# Altium PCB LOAD CONTROL_Final2.PcbDoc (part 1 of 2)
Units mm, origin at the board's own origin, x right, y up, seen from the top; angles counter-clockwise.
Board outline 51.64 x 106.92 mm, 2 copper layers (Top Layer, Bottom Layer); 86 components, 56 nets, 285 pads, 99 vias.
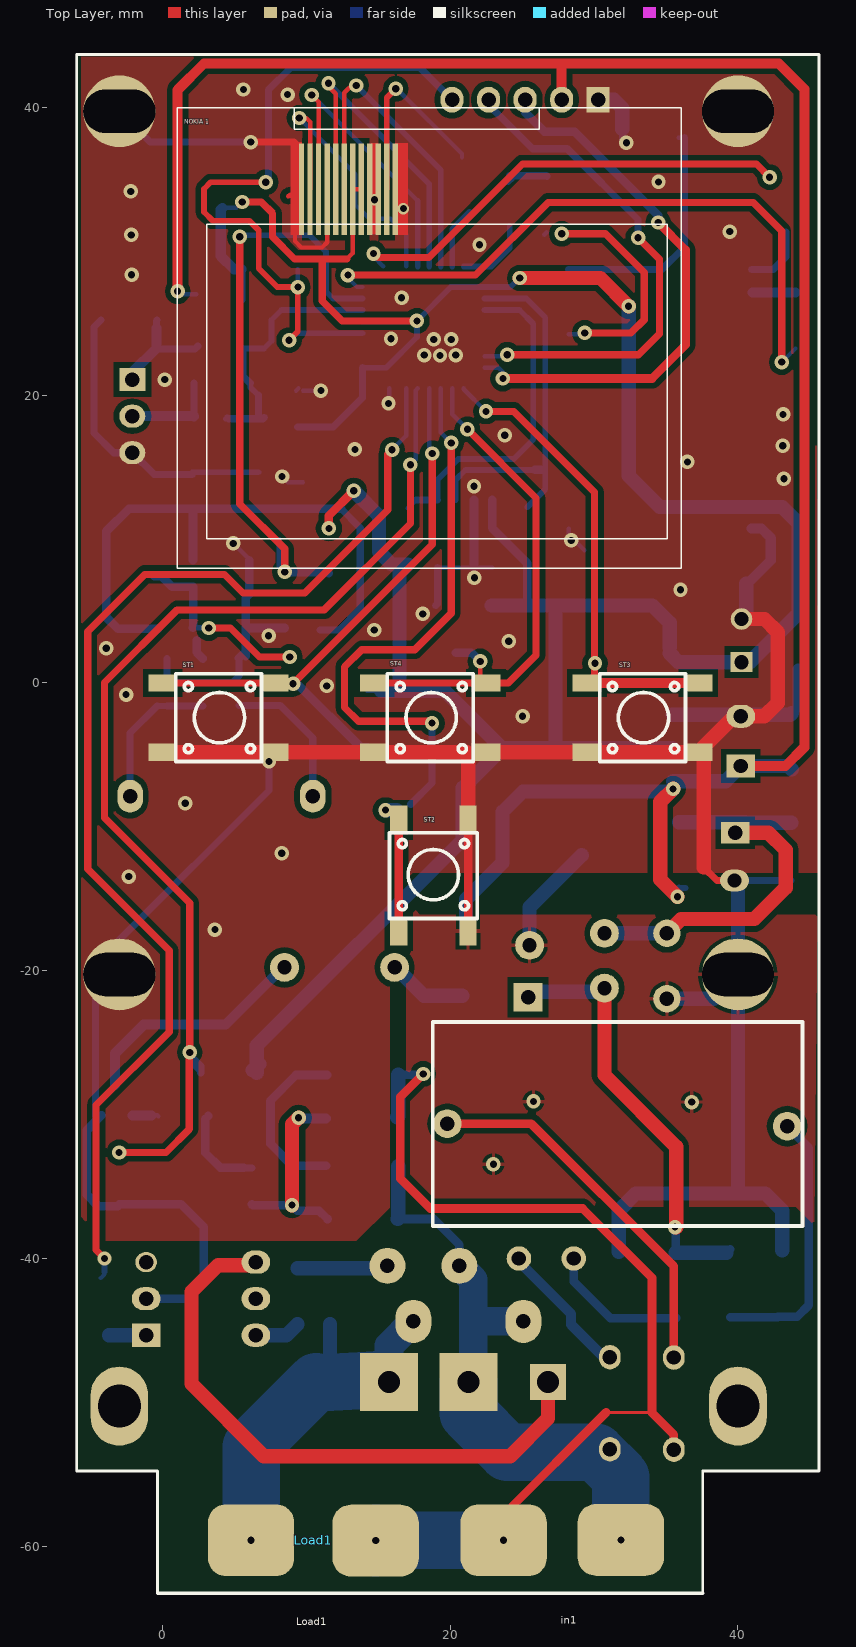
[diagram p0: Top Layer view]
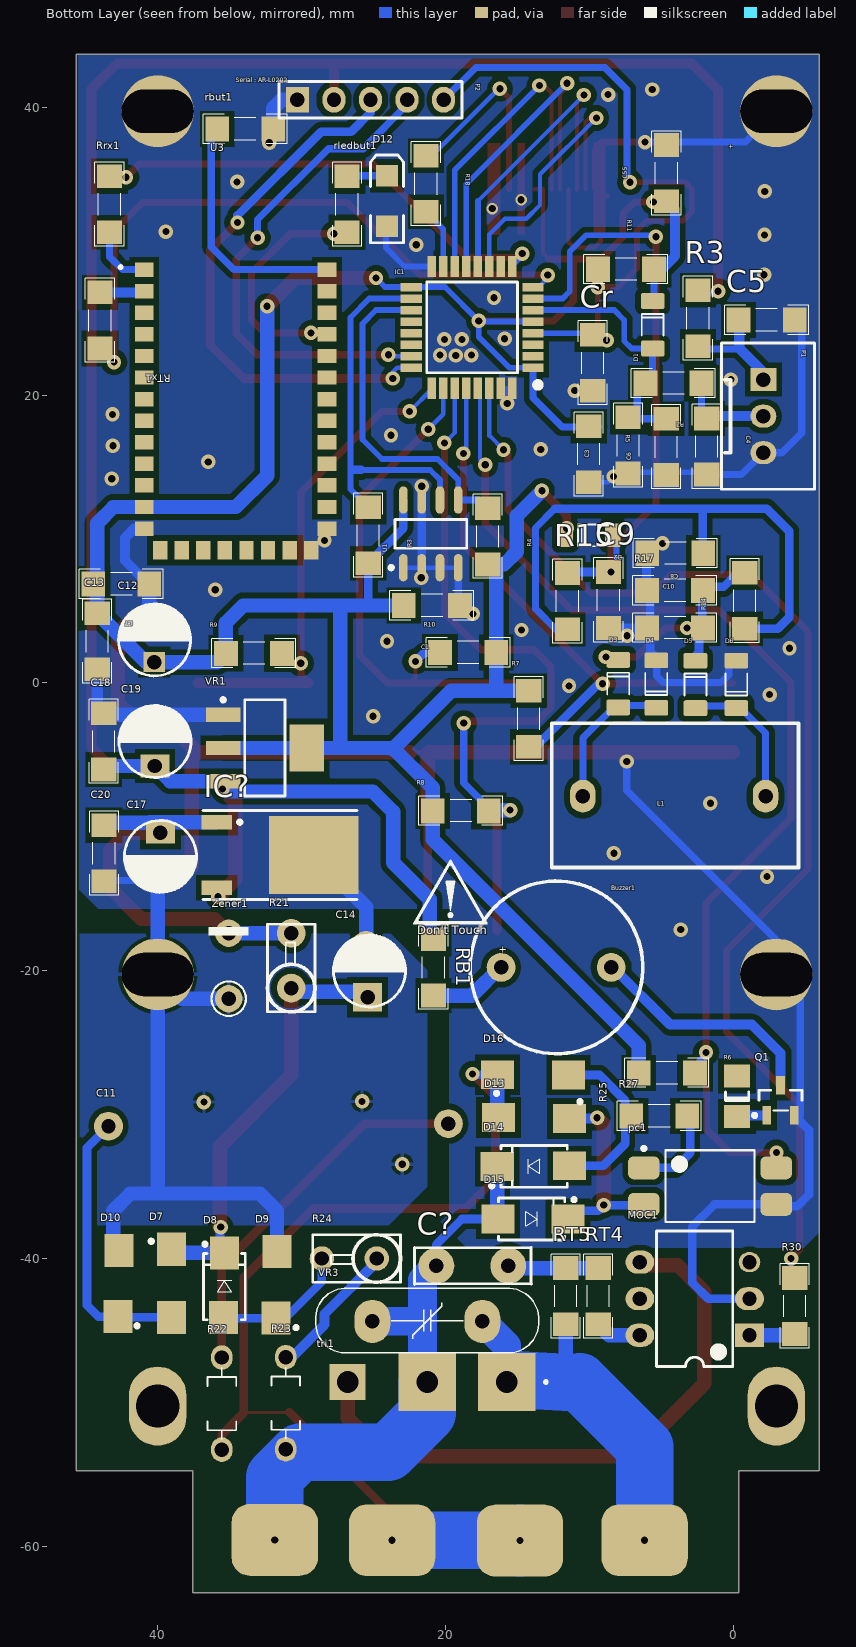
[diagram p1: Bottom Layer view, seen from below]
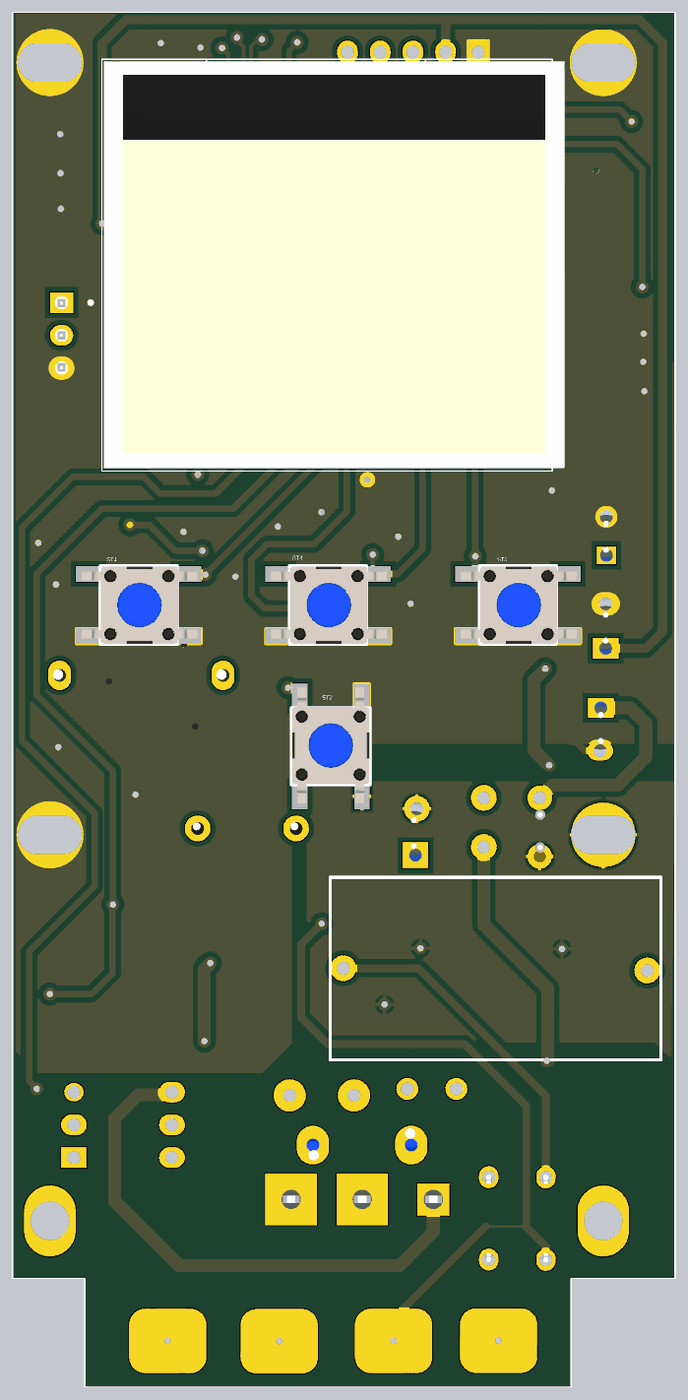
[diagram p2: 3D render of the assembled board from above, using the file's embedded part models]
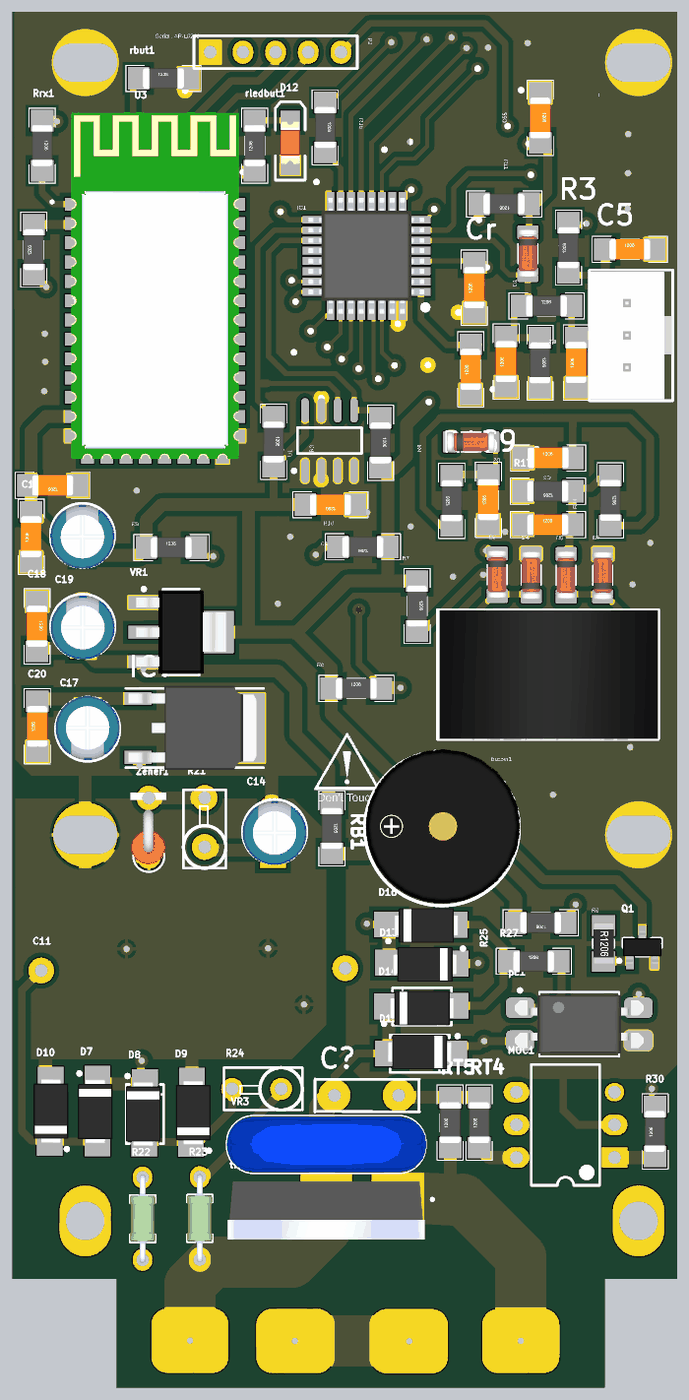
[diagram p3: 3D render of the assembled board from below, using the file's embedded part models]

## Layer stack, top to bottom
Top Solder: solder mask 0.0102, Solder Resist, Dk 3.5
Top Layer: signal copper 0.0356
Dielectric 1: dielectric 0.32, FR-4, Dk 4.8
Bottom Layer: signal copper 0.0356
Bottom Solder: solder mask 0.0102, Solder Resist, Dk 3.5

## Board outline
-0.358,-63.231 -0.358,-54.77 -5.969,-54.77 -5.969,43.686 45.666,43.686 45.666,-54.77 37.592,-54.77 37.592,-63.231

## Design rules (kind name [scope] priority, off if disabled: settings)
Clearance Clearance_18 [InNamedPolygon('Top Layer-No Net')] p1: gap=0.4 ignorepadtopadclearanceinfootprint=FALSE
Clearance Clearance_17 [InNamedPolygon('Top Layer-No Net')] p2: gap=0.254 ignorepadtopadclearanceinfootprint=FALSE except(0: Arc-Hole Track-Hole SMDPad-Hole THPad-Hole Via-Hole Fill-Hole Poly-Hole Region-Hole Text-Hole)
Clearance Clearance_16 [InNamedPolygon('Top Layer-No Net')] p3: gap=0.4 ignorepadtopadclearanceinfootprint=FALSE
Clearance Clearance_15 [InNamedPolygon('GND_L02_P008')] p4: gap=0.3 ignorepadtopadclearanceinfootprint=TRUE
Clearance Clearance_14 [InNamedPolygon('GND_L01_P006')] p5: gap=0.381 ignorepadtopadclearanceinfootprint=TRUE
Clearance Clearance_13 [InNamedPolygon('GND_L01_P006')] p6: gap=0.381 ignorepadtopadclearanceinfootprint=TRUE
Clearance Clearance_12 [InNamedPolygon('GND_L01_P006')] p7: gap=0.2 ignorepadtopadclearanceinfootprint=FALSE
Clearance Clearance_11 [InNamedPolygon('GND_L01_P006')] p8: gap=0.254 ignorepadtopadclearanceinfootprint=FALSE except(0: Arc-Hole Track-Hole SMDPad-Hole THPad-Hole Via-Hole Fill-Hole Poly-Hole Region-Hole Text-Hole)
Clearance Clearance_10 [InNamedPolygon('GND_L02_P008')] p9: gap=0.5 ignorepadtopadclearanceinfootprint=FALSE
Clearance Clearance_9 [InNamedPolygon('GND_L01_P006')] p10: gap=0.5 ignorepadtopadclearanceinfootprint=FALSE
Clearance Clearance_8 [InNamedPolygon('GND_L01_P006')] p11: gap=0.254 ignorepadtopadclearanceinfootprint=FALSE except(0: Arc-Hole Track-Hole SMDPad-Hole THPad-Hole Via-Hole Fill-Hole Poly-Hole Region-Hole Text-Hole)
Clearance Clearance_7 [InNamedPolygon('GND_L01_P006')] p12: gap=0.5 ignorepadtopadclearanceinfootprint=FALSE
Clearance Clearance_6 [InNamedPolygon('GND_L01_P006')] p13: gap=0.254 ignorepadtopadclearanceinfootprint=FALSE except(0: Arc-Hole Track-Hole SMDPad-Hole THPad-Hole Via-Hole Fill-Hole Poly-Hole Region-Hole Text-Hole)
Clearance 0 [InNamedPolygon('GND_L01_P006')] p14: gap=0.254 ignorepadtopadclearanceinfootprint=FALSE except(0: Arc-Hole Track-Hole SMDPad-Hole THPad-Hole Via-Hole Fill-Hole Poly-Hole Region-Hole Text-Hole)
Clearance Clearance_5 [InNamedPolygon('GND_L01_P006')] p15: gap=0.254 ignorepadtopadclearanceinfootprint=FALSE except(0: Arc-Hole Track-Hole SMDPad-Hole THPad-Hole Via-Hole Fill-Hole Poly-Hole Region-Hole Text-Hole)
Clearance Clearance_4 [InNamedPolygon('GND-E_L02_P002')] p16: gap=0.508 ignorepadtopadclearanceinfootprint=FALSE
Clearance Clearance_3 [InNamedPolygon('GND_L01_P001')] p17: gap=0.635 ignorepadtopadclearanceinfootprint=FALSE
Clearance Clearance_2 [InNamedPolygon('GND_L02_P000')] p18: gap=0.508 ignorepadtopadclearanceinfootprint=FALSE
Clearance Clearance_1 [InNamedPolygon('Bottom Layer-GND')] p19: gap=0.356 ignorepadtopadclearanceinfootprint=FALSE
Clearance [All] p20: gap=0.4 ignorepadtopadclearanceinfootprint=FALSE
PolygonConnect PolygonConnect_14 [All vs IsNamedPolygon('GND_L02_P008')] p1: thpad.connectstyle=Relief thpad.reliefconductorwidth=0.762 thpad.reliefentries=4 thpad.polygonreliefangle="90 Angle" thpad.airgapwidth=0.3 smdpad.connectstyle=Relief smdpad.reliefconductorwidth=0.508 smdpad.reliefentries=4 smdpad.polygonreliefangle="90 Angle" smdpad.airgapwidth=0.3 via.connectstyle=Relief via.reliefconductorwidth=0.254 via.reliefentries=4 via.polygonreliefangle="90 Angle" via.airgapwidth=0.3
PolygonConnect PolygonConnect_13 [All vs IsNamedPolygon('GND_L01_P006')] p2: thpad.connectstyle=Relief thpad.reliefconductorwidth=0.889 thpad.reliefentries=4 thpad.polygonreliefangle="90 Angle" thpad.airgapwidth=0.254 smdpad.connectstyle=Relief smdpad.reliefconductorwidth=0.635 smdpad.reliefentries=4 smdpad.polygonreliefangle="90 Angle" smdpad.airgapwidth=0.254 via.connectstyle=Direct via.reliefconductorwidth=0.254 via.reliefentries=4 via.polygonreliefangle="90 Angle" via.airgapwidth=0.254
PolygonConnect PolygonConnect_12 [All vs IsNamedPolygon('GND_L01_P006')] p3: thpad.connectstyle=Relief thpad.reliefconductorwidth=0.889 thpad.reliefentries=4 thpad.polygonreliefangle="90 Angle" thpad.airgapwidth=0.254 smdpad.connectstyle=Relief smdpad.reliefconductorwidth=0.508 smdpad.reliefentries=4 smdpad.polygonreliefangle="90 Angle" smdpad.airgapwidth=0.254 via.connectstyle=Direct via.reliefconductorwidth=0.254 via.reliefentries=4 via.polygonreliefangle="90 Angle" via.airgapwidth=0.254
PolygonConnect PolygonConnect_11 [All vs IsNamedPolygon('GND_L01_P006')] p4: thpad.connectstyle=Relief thpad.reliefconductorwidth=0.508 thpad.reliefentries=4 thpad.polygonreliefangle="90 Angle" thpad.airgapwidth=0.254 smdpad.connectstyle=Relief smdpad.reliefconductorwidth=0.508 smdpad.reliefentries=4 smdpad.polygonreliefangle="90 Angle" smdpad.airgapwidth=0.254 via.connectstyle=Direct via.reliefconductorwidth=0.254 via.reliefentries=4 via.polygonreliefangle="90 Angle" via.airgapwidth=0.254
PolygonConnect PolygonConnect_10 [All vs IsNamedPolygon('GND_L01_P006')] p5: thpad.connectstyle=Relief thpad.reliefconductorwidth=0.254 thpad.reliefentries=4 thpad.polygonreliefangle="90 Angle" thpad.airgapwidth=0.254 smdpad.connectstyle=Relief smdpad.reliefconductorwidth=0.254 smdpad.reliefentries=4 smdpad.polygonreliefangle="90 Angle" smdpad.airgapwidth=0.254 via.connectstyle=Direct via.reliefconductorwidth=0.254 via.reliefentries=4 via.polygonreliefangle="90 Angle" via.airgapwidth=0.254
PolygonConnect PolygonConnect_9 [All vs IsNamedPolygon('GND_L01_P006')] p6: thpad.connectstyle=Direct thpad.reliefconductorwidth=0.254 thpad.reliefentries=4 thpad.polygonreliefangle="90 Angle" thpad.airgapwidth=0.254 smdpad.connectstyle=Relief smdpad.reliefconductorwidth=0.254 smdpad.reliefentries=4 smdpad.polygonreliefangle="90 Angle" smdpad.airgapwidth=0.254 via.connectstyle=Relief via.reliefconductorwidth=0.254 via.reliefentries=4 via.polygonreliefangle="90 Angle" via.airgapwidth=0.254
PolygonConnect PolygonConnect_8 [All vs IsNamedPolygon('GND_L01_P006')] p7: connectstyle=Relief reliefconductorwidth=0.254 reliefentries=4 polygonreliefangle="90 Angle" airgapwidth=0.254
PolygonConnect PolygonConnect_7 [All vs IsNamedPolygon('GND_L02_P008')] p8: connectstyle=Relief reliefconductorwidth=0.254 reliefentries=4 polygonreliefangle="90 Angle" airgapwidth=0.254
PolygonConnect PolygonConnect_6 [All vs IsNamedPolygon('GND_L02_P008')] p9: connectstyle=Direct reliefconductorwidth=0.254 reliefentries=4 polygonreliefangle="90 Angle" airgapwidth=0.254
PolygonConnect PolygonConnect_5 [All vs IsNamedPolygon('GND_L02_P008')] p10: thpad.connectstyle=Direct thpad.reliefconductorwidth=0.254 thpad.reliefentries=4 thpad.polygonreliefangle="90 Angle" thpad.airgapwidth=0.254 smdpad.connectstyle=Relief smdpad.reliefconductorwidth=0.254 smdpad.reliefentries=4 smdpad.polygonreliefangle="90 Angle" smdpad.airgapwidth=0.254 via.connectstyle=Relief via.reliefconductorwidth=0.254 via.reliefentries=4 via.polygonreliefangle="90 Angle" via.airgapwidth=0.254
PolygonConnect PolygonConnect_4 [All vs IsNamedPolygon('GND-E_L02_P002')] p11: thpad.connectstyle=Relief thpad.reliefconductorwidth=0.635 thpad.reliefentries=4 thpad.polygonreliefangle="90 Angle" thpad.airgapwidth=0.254 smdpad.connectstyle=Relief smdpad.reliefconductorwidth=0.381 smdpad.reliefentries=4 smdpad.polygonreliefangle="90 Angle" smdpad.airgapwidth=0.254 via.connectstyle=Direct via.reliefconductorwidth=0.254 via.reliefentries=4 via.polygonreliefangle="90 Angle" via.airgapwidth=0.254
PolygonConnect PolygonConnect_3 [All vs IsNamedPolygon('GND_L01_P001')] p12: thpad.connectstyle=Relief thpad.reliefconductorwidth=0.635 thpad.reliefentries=4 thpad.polygonreliefangle="90 Angle" thpad.airgapwidth=0.254 smdpad.connectstyle=Relief smdpad.reliefconductorwidth=0.635 smdpad.reliefentries=4 smdpad.polygonreliefangle="90 Angle" smdpad.airgapwidth=0.254 via.connectstyle=Direct via.reliefconductorwidth=0.254 via.reliefentries=4 via.polygonreliefangle="90 Angle" via.airgapwidth=0.254
PolygonConnect PolygonConnect_2 [All vs IsNamedPolygon('GND_L02_P000')] p13: thpad.connectstyle=Relief thpad.reliefconductorwidth=0.635 thpad.reliefentries=4 thpad.polygonreliefangle="90 Angle" thpad.airgapwidth=0.254 smdpad.connectstyle=Relief smdpad.reliefconductorwidth=0.254 smdpad.reliefentries=4 smdpad.polygonreliefangle="90 Angle" smdpad.airgapwidth=0.381 via.connectstyle=Direct via.reliefconductorwidth=0.254 via.reliefentries=4 via.polygonreliefangle="90 Angle" via.airgapwidth=0.254
PolygonConnect PolygonConnect_1 [All vs IsNamedPolygon('Bottom Layer-GND')] p14: thpad.connectstyle=Relief thpad.reliefconductorwidth=0.635 thpad.reliefentries=4 thpad.polygonreliefangle="90 Angle" thpad.airgapwidth=0.254 smdpad.connectstyle=Relief smdpad.reliefconductorwidth=0.381 smdpad.reliefentries=4 smdpad.polygonreliefangle="90 Angle" smdpad.airgapwidth=0.254 via.connectstyle=Direct via.reliefconductorwidth=0.254 via.reliefentries=4 via.polygonreliefangle="90 Angle" via.airgapwidth=0.254
PolygonConnect [All] p15: connectstyle=Direct reliefconductorwidth=0 reliefentries=2 polygonreliefangle="90 Angle" airgapwidth=0
RoutingVias [All] p1: holewidth=0.5 width=1 viastyle="Through Hole" minholewidth=0.5 minwidth=1 maxholewidth=0.5 maxwidth=1
SolderMaskExpansion [All] p1: expansion=0.102
Width [All] p1: maxlimit=4 minlimit=0.3 preferedwidth=0.4
30 further rules are at their usual default settings.

## Components (designator, comment, footprint, x,y, rotation, side; value= is the part's Value field where it differs from the comment)
Buzzer1 "Buzzer" BUZZER 12.471,-19.863 r90 bottom
C1 "0.1uF" CAPC4817X12N 20.961,5.385 r0 bottom
C3 "0.1uF" CAPC4817X12N 7.315,16.51 r90 bottom
C4 "0.1uF" CAPC4817X12N 1.854,16.434 r90 bottom
C5 "0.1uF" CAPC4817X12N -2.311,25.222 r180 bottom
C6 "0.1uF" CAPC4817X12N 10.058,15.9 r90 bottom
C7 "0.1uF" CAPC4817X12N 42.545,6.883 r0 bottom
C8 "0.1uF" CAPC4817X12N 4.039,9.017 r180 bottom
C9 "0.1uF" CAPC4817X12N 8.687,5.766 r90 bottom
C10 "0.1uF" CAPC4817X12N 4.064,3.83 r180 bottom
C11 "Cap" RAD-0.3 32.283,-33.426 r0 bottom value=1.5uf
C12 "1uF" "Cap electrolitic radial 5x11-2"#1 40.234,2.896 r90 bottom
C13 "0.1uF" CAPC4817X12N 44.221,2.896 r90 bottom
C14 "1uF" "Cap electrolitic radial 5x11-2"#2 25.298,-20.117 r90 bottom
C17 "1uF" "Cap electrolitic radial 5x11-2"#3 39.827,-11.963 r270 bottom
C18 "0.1uF" CAPC4817X12N 43.764,-4.064 r270 bottom
C19 "1uF" "Cap electrolitic radial 5x11-2"#4 40.208,-4.166 r90 bottom
C20 "0.1uF" CAPC4817X12N 43.739,-11.836 r90 bottom
C55 "0.1uF" CAPC4817X12N 4.648,35.433 r270 bottom
C? "100nF" "Cap 10nF" 15.65,-40.513 r0 bottom
Cr "0.1uF" CAPC4817X12N 9.779,22.25 r90 bottom
D1 "1N4148UR-1" "SOD80, LL-34" 5.613,24.892 r270 bottom
D2 "1N4148UR-1" "SOD80, LL-34" 10.033,10.262 r180 bottom
D3 "1N4148UR-1" "SOD80, LL-34" 8.001,-0.051 r270 bottom
D4 "1N4148UR-1" "SOD80, LL-34" 5.359,-0.076 r90 bottom
D5 "1N4148UR-1" "SOD80, LL-34" 2.642,-0.103 r270 bottom
D6 "1N4148UR-1" "SOD80, LL-34" -0.203,-0.102 r90 bottom
D7 "1n4007" DIOM4629X24N#1 39.116,-41.758 r90 bottom
D8 "1n4007" DIOM4629X24N#2 35.382,-41.961 r90 bottom
D9 "1n4007" DIOM4629X24N#3 31.75,-41.859 r270 bottom
D10 "1n4007" DIOM4629X24N#4 42.799,-41.732 r270 bottom
D12 "SMD 1206 LED" "LED 1206" 24.079,33.496 r90 bottom
D13 "1n4007" DIOM4629X24N#5 13.614,-30.455 r180 bottom
D14 "1n4007" DIOM4629X24N#6 13.847,-33.604 r0 bottom
D15 "1n4007" DIOM4629X24N#7 14.025,-37.262 r180 bottom
D16 "1n4007" DIOM4629X24N#8 13.513,-27.178 r0 bottom
IC1 "STM32F030K6T6TR" QFP80P900X900X160-32N 18.161,24.714 r0 bottom
IC? "L78M05" TO-252 32.537,-11.963 r270 bottom
in1 "220vIn" HDR1X2#1 6.756,-61.519 r180 top
L1 "0" ZMC 3.988,-7.874 r0 bottom value=300uH
Load1 "Header 2" HDR1X2#2 7.188,-67.234 r180 top
MOC1 "MOC3021-3" DIP-6 2.692,-42.799 r0 bottom
"NOKIA 1" "LCD2" "LCD NOKIA 1202" 18.732,23.98 r0 top
P1 "Header 3" 3PIN -2.083,18.542 r270 bottom
P2 "Header 5" HDR1X5 30.302,40.538 r180 bottom
pc1 "PC817" "SMT Gullwing Lead-Form" 1.626,-34.976 r180 bottom
Q1 "BC817" SOT23_N -3.277,-29.007 r90 bottom
R2 "1K" RESC4817X04N 4.166,20.828 r180 bottom value=1k
R3 "1K" RESC4817X04N 2.464,25.349 r90 bottom value=1k
R3 "1K" RESC4817X04N 25.375,10.262 r270 bottom value=1k
R4 "1K" RESC4817X04N 17.069,10.185 r270 bottom value=1k
R5 "1K" RESC4817X04N 4.674,16.408 r270 bottom value=1k
R6 "Res Semi" R1206 -0.203,-28.651 r0 bottom value=1k
R7 "1K" RESC4817X04N 14.224,-2.489 r270 bottom value=1k
R8 "1K" RESC4817X04N 18.948,-8.89 r180 bottom value=1k
R9 "1K" RESC4817X04N 33.325,2.057 r180 bottom value=1k
R10 "1K" RESC4817X04N 18.44,2.108 r0 bottom value=1k
R11 "1K" RESC4817X04N 7.468,28.753 r0 bottom value=1k
R14 "1K" RESC4817X04N -0.787,5.715 r270 bottom value=1k
R15 "1K" RESC4817X04N 11.532,5.69 r90 bottom value=1k
R17 "1K" RESC4817X04N 4.064,6.426 r0 bottom value=1k
R18 "1K" RESC4817X04N 21.361,34.696 r270 bottom value=1k
R21 "10r" RES-(1/2)-Stand#1 30.734,-21.209 r90 bottom
R22 "1614997-1" RESAD640W45L370D200 35.56,-50.089 r90 bottom
R23 "1614997-1" RESAD640W45L370D200 31.115,-50.063 r90 bottom
R24 "10r" RES-(1/2)-Stand#2 24.79,-40.005 r0 bottom
R25 "1K" RESC4817X04N 4.623,-27.102 r0 bottom value=1k
R27 "100K" RESC4817X04N 5.156,-30.099 r180 bottom value=100k
R30 "1K" RESC4817X04N -4.267,-43.307 r90 bottom
RB1 "1K" RESC4817X04N 20.853,-19.771 r270 bottom value=1k
rbut1 "10k" RESC4817X04N 33.934,38.506 r180 bottom
rledbut1 "10k" RESC4817X04N 26.848,33.274 r90 bottom
Rrx1 "330r" RESC4817X04N 43.358,33.274 r270 bottom
RT4 "330r" RESC4817X04N 9.398,-42.621 r90 bottom
RT5 "330r" RESC4817X04N 11.659,-42.621 r90 bottom
RTx1 "330r" RESC4817X04N 44.018,25.197 r90 bottom
ST1 "SW-PB" "PUSH BOTTOM 6*6" 3.974,-2.286 r90 top
ST2 "SW-PB" "PUSH BOTTOM 6*6" 18.716,-13.327 r180 top
ST3 "SW-PB" "PUSH BOTTOM 6*6" 33.451,-2.286 r90 top
ST4 "SW-PB" "PUSH BOTTOM 6*6" 18.694,-2.286 r90 top
tri1 "BTA41" TO552P1530X450X2110-3B 21.285,-48.59 r0 bottom
U1 "Serial EEPROM(24C04)" SO8_L 21.031,10.363 r90 bottom
U3 "HC-05" XCVR_HC-05 34.595,22.403 r180 bottom
VR1 "AMS1117-xx" SOT-223 32.563,-4.521 r0 bottom
VR3 "xxDxxx" "14D XXX" 21.285,-44.323 r180 bottom
Zener1 "Diode Zener" "Diode 1W_Stand" 35.103,-19.964 r90 bottom

## Footprints (in the part's own frame and the unit in brackets; to place one, negate y for a bottom-side part, rotate by r counter-clockwise, add the part's x,y. Pads: shape width x height; smd on the part's side, far side on the other; paste and mask are expansions set on the pad)
3PIN [mm]
  rect 1.6x1.8 hole 1: 1(-2.54,0)
  oval 1.6x1.8 hole 1: 2(0,0) 3(2.54,0)
  silkscreen extent -5.08,-2.92 5.08,3.56, body extent -4.95,-2.9 4.95,3.49, height 7
"14D XXX" [mm] "MOV-14DxxxK Metal Oxide Varistors (MOVs) are 14 mm-Design:Abbas Basereh"
  oval 2.5x3 hole 1: 1(3.836,-0.051) 2(-3.81,-0.051)
  silkscreen extent -7.75,-2.25 7.75,2.25, body extent -7.73,-2.1 7.77,2.1, height 19.5
BUZZER [mm]
  round 2 hole 1: 1(0.092,3.675) 2(0.092,-3.975)
  silkscreen extent -5.91,-6.17 6.09,5.83, body extent -5.75,-6.25 6.25,5.75, height 9.5
"Cap 10nF" [mm]
  round 2.5 hole 1: 1(0,0) 2(5,0)
  silkscreen extent -1.62,-1.28 6.51,1.29
"Cap electrolitic radial 5x11-2"#1 [mm] "Cap electrolitic radial 5x11-2-Design:Abbas Basereh"
  rect 1.4x1.5 hole 1: 1(-1.448,0.025)
  round 1.5 hole 1: 2(1.549,0.025)
  silkscreen extent -2.4,-2.5 2.6,2.5, body extent -2.5,-2.5 2.5,2.5, height 11.3
"Cap electrolitic radial 5x11-2"#2 [mm] "Cap electrolitic radial 5x11-2-Design:Abbas Basereh"
  rect 2x2 hole 1: 1(-1.727,0.127)
  round 2 hole 1: 2(1.88,0.229)
  silkscreen extent -2.4,-2.5 2.6,2.5, body extent -2.5,-2.5 2.5,2.5, height 11.3
"Cap electrolitic radial 5x11-2"#3 [mm] "Cap electrolitic radial 5x11-2-Design:Abbas Basereh"
  rect 1.5x2 hole 1: 1(-1.559,0)
  oval 1.5x2 hole 1: 2(1.769,0.051)
  silkscreen extent -2.4,-2.5 2.6,2.5, body extent -2.5,-2.5 2.5,2.5, height 11.3
"Cap electrolitic radial 5x11-2"#4 [mm] "Cap electrolitic radial 5x11-2-Design:Abbas Basereh"
  rect 1.6x2 hole 1: 1(-1.61,0)
  oval 1.6x2 hole 1: 2(1.845,0)
  silkscreen extent -2.4,-2.5 2.6,2.5, body extent -2.5,-2.5 2.5,2.5, height 11.3
CAPC4817X12N [mm] "Chip Capacitor, 2-Leads, Body 4/80x1/70mm, IPC Medium Density-Design:Abbas Basereh"
  rect 1.65x1.75 smd: 1(-1.95,0) 2(1.95,0)
  silkscreen extent -2.92,-1.02 2.92,1.02, body extent -1.6,-0.8 1.6,0.8, height 1
"Diode 1W_Stand" [mil]
  round 75 hole 39.37: 1(-78,-1) 2(101,-1)
  silkscreen extent -125,-55 118,55, body extent -103,-52 65,53, height 291
DIOM4629X24N#1 [mm] "Molded Diode, 2-Leads, Body 4/60x2/90mm, IPC Medium Density-Design:Abbas Basereh"
  rect 2.3x2 smd: 1(-2.337,-0.051) 2(2.395,-0.051)
  silkscreen extent 2.83,1.23 3.07,1.48, body extent -2.5,-1.22 2.5,1.48, height 2.2
DIOM4629X24N#2 [mm] "Molded Diode, 2-Leads, Body 4/60x2/90mm, IPC Medium Density-Design:Abbas Basereh"
  rect 2.3x2 smd: 1(-2.152,0.05) 2(2.344,-0.001)
  silkscreen extent -2.3,-1.45 3.07,1.48, body extent -2.5,-1.22 2.5,1.48, height 2.2
DIOM4629X24N#3 [mm] "Molded Diode, 2-Leads, Body 4/60x2/90mm, IPC Medium Density-Design:Abbas Basereh"
  rect 2.3x2 smd: 1(-2.33,0.025) 2(2.286,-0.051)
  silkscreen extent 2.83,1.22 3.07,1.47, body extent -2.5,-1.22 2.5,1.48, height 2.2
DIOM4629X24N#4 [mm] "Molded Diode, 2-Leads, Body 4/60x2/90mm, IPC Medium Density-Design:Abbas Basereh"
  rect 2.3x2 smd: 1(-2.297,0.102) 2(2.311,0.025)
  silkscreen extent 2.83,1.22 3.07,1.47, body extent -2.5,-1.22 2.5,1.48, height 2.2
DIOM4629X24N#5 [mm] "Molded Diode, 2-Leads, Body 4/60x2/90mm, IPC Medium Density-Design:Abbas Basereh"
  rect 2.3x2 smd: 1(-2.718,0.254) 2(2.235,0.178)
  silkscreen extent 2.83,1.23 3.07,1.47, body extent -2.5,-1.22 2.5,1.48, height 2.2
DIOM4629X24N#6 [mm] "Molded Diode, 2-Leads, Body 4/60x2/90mm, IPC Medium Density-Design:Abbas Basereh"
  rect 2.3x2 smd: 1(-2.464,-0.051) 2(2.565,0)
  silkscreen extent -2.3,-1.45 3.08,1.47, body extent -2.5,-1.22 2.5,1.48, height 2.2
DIOM4629X24N#7 [mm] "Molded Diode, 2-Leads, Body 4/60x2/90mm, IPC Medium Density-Design:Abbas Basereh"
  rect 2.3x2 smd: 1(-2.337,0) 2(2.54,0)
  silkscreen extent -2.3,-1.45 3.07,1.47, body extent -2.5,-1.22 2.5,1.48, height 2.2
DIOM4629X24N#8 [mm] "Molded Diode, 2-Leads, Body 4/60x2/90mm, IPC Medium Density-Design:Abbas Basereh"
  rect 2.3x2 smd: 1(-2.058,0.076) 2(2.896,0.051)
  silkscreen extent 2.83,1.23 3.08,1.47, body extent -2.5,-1.22 2.5,1.48, height 2.2
DIP-6 [mm] "DIP; 6 Leads; Row Spacing 7.62 mm; Pitch 2.54 mm"
  rect 2x1.6 hole 1: 1(-3.81,2.54)
  oval 2x1.6 hole 1: 2(-3.81,0) 4(3.81,-2.54) 5(3.81,0) 6(3.81,2.54)
  oval 1.5x1.4 hole 1: 3(-3.81,-2.54)
  silkscreen extent -2.65,-4.7 2.65,4.7
HDR1X2#1 [mm] "Connector; Header; 2 Position"
  rrect50% 6x5 hole 0.5: 1(-25.121,-1.956) 2(-16.967,-1.93)
HDR1X2#2 [mm] "Connector; Header; 2 Position"
  rrect50% 6x5 hole 0.5: 1(-7.645,-7.62) 2(1.016,-7.645)
HDR1X5 [mm] "Connector; Header; 5 Position"
  rect 1.6x1.8 hole 1: 1(0,0)
  oval 1.6x1.8 hole 1: 2(2.54,0) 3(5.08,0) 4(7.62,0) 5(10.16,0)
  silkscreen extent -1.27,-1.27 11.43,1.27
"LCD NOKIA 1202" [mm]
  rect 0.35x6.35 smd: 1(-9.039,10.344) 2(-8.448,10.344) 3(-7.857,10.344) 4(-7.267,10.344) 5(-6.676,10.344) 6(-6.085,10.344) 7(-5.494,10.344) 8(-4.903,10.344) 9(-4.312,10.344) 10(-3.721,10.344) 11(-3.13,10.344) 12(-2.539,10.344)
  silkscreen extent -17.68,-15.99 17.32,16.01, body extent -17.52,-15.75 18.28,15.85, height 2.51
"LED 1206" [mm]
  rect 1.5x1.5 smd: 1(-1.75,0) 2(1.75,0)
  silkscreen extent -2.9,-1.15 3.2,1.15, body extent -1.65,-0.72 1.65,0.73, height 1.36
"PUSH BOTTOM 6*6" [mm]
  rect 1.2x2 smd: 1(-2.54,3.937) 1(-2.54,-3.81) 2(2.286,-3.81) 2(2.286,3.937)
  silkscreen extent -3.18,-2.92 2.92,3.05, body extent -3.13,-4.5 2.87,4.5, height 4.2
QFP80P900X900X160-32N [mm] "Integrated Circuit"
  rect 1.475x0.6 smd: 1(-4.238,2.8) 2(-4.238,2) 3(-4.238,1.2) 4(-4.238,0.4) 5(-4.238,-0.4) 6(-4.238,-1.2) 7(-4.238,-2) 8(-4.238,-2.8) 17(4.238,-2.8) 18(4.238,-2) 19(4.238,-1.2) 20(4.238,-0.4) 21(4.238,0.4) 22(4.238,1.2) 23(4.238,2) 24(4.238,2.8)
  rect 0.6x1.475 smd: 9(-2.8,-4.238) 10(-2,-4.238) 11(-1.2,-4.238) 12(-0.4,-4.238) 13(0.4,-4.238) 14(1.2,-4.238) 15(2,-4.238) 16(2.8,-4.238) 25(2.8,4.238) 26(2,4.238) 27(1.2,4.238) 28(0.4,4.238) 29(-0.4,4.238) 30(-1.2,4.238) 31(-2,4.238) 32(-2.8,4.238)
  silkscreen extent -4.77,-3.15 3.15,4.2, body extent -4.5,-4.5 4.5,4.5, height 1.6
R1206 [mm]
  rect 1.8x1.6 smd: 1(-0.059,1.469) 2(-0.059,-1.331)
  silkscreen extent -0.86,-0.23 0.74,0.37, body extent -0.89,-1.56 0.71,1.64, height 0.85
RAD-0.3 [mm] "Radial Cap, Thru-Hole; 2 Leads; 0.3 in Pin Spacing"
  round 2 hole 1: 1(-12.471,-2.794) 2(11.151,-2.616)
RES-(1/2)-Stand#1 [mm]
  round 2 hole 1: 1(0,0) 2(3.81,0)
  silkscreen extent -1.65,-1.65 4.44,1.65, body extent -1.68,-1.67 4.14,1.67, height 11
RES-(1/2)-Stand#2 [mm]
  round 1.7 hole 1: 1(0,0) 2(3.81,0)
  silkscreen extent -1.65,-1.65 4.44,1.65, body extent -1.68,-1.67 4.14,1.67, height 11
RESAD640W45L370D200 [mm]
  oval 1.7x1.5 hole 1: 1(-3.2,0) 2(3.2,0)
  silkscreen extent -2.47,-1 2.47,1, body extent -3.42,-1 3.42,1, height 2
RESC4817X04N [mm] "Chip Resistor, 2-Leads, Body 4/80x1/70mm, IPC Medium Density-Design:Abbas Basereh"
  rect 1.65x1.75 smd: 1(-1.95,0) 2(1.95,0)
  silkscreen extent -2.92,-1.02 2.92,1.02, body extent -1.6,-0.8 1.6,0.8, height 1
"SMT Gullwing Lead-Form" [mm] "SOP, 4-Leads, Body 4/65x6/75mm, Pitch 2/54mm, IPC Medium Density designer:abbas basereh"
  rrect50% 2.2x1.6 smd mask+0.06: 1(-4.6,1.27) 2(-4.6,-1.27) 3(4.6,-1.27) 4(4.6,1.27)
  silkscreen extent -4.73,-2.5 3.1,2.74, body extent -5,-2.29 5,2.29, height 3.89
SO8_L [mm] "SOIC, 8-Leads, Body 4.9x3.9mm, Pitch 1.27mm, IPC High Density"
  oval 1.9x0.6 smd: 1(-2.35,1.905) 2(-2.35,0.635) 3(-2.35,-0.635) 4(-2.35,-1.905) 5(2.35,-1.905) 6(2.35,-0.635) 7(2.35,0.635) 8(2.35,1.905)
  silkscreen extent -2.47,-2.5 1,2.88, body extent -2,-2.5 2,2.5, height 1.75
"SOD80, LL-34" [mm] "Diode, MiniMELF"
  round 0.5 on Mech15: 0(0,0)
  rrect25% 1.1x1.65 smd: 1(1.65,0) 2(-1.65,0)
  silkscreen extent -0.76,-0.76 0.76,0.76, body extent -1.88,-0.8 1.82,0.8, height 1.6
SOT23_N [mm] "SOT23, 3-Leads, Body 2.9x1.3mm, Pitch 0.95mm, Lead Span 2.3mm, IPC Medium Density"
  rect 1.3x0.6 smd: 1(-1.05,0.95) 2(-1.05,-0.95) 3(1.05,0)
  silkscreen extent -1.17,-1.5 0.7,1.93, body extent -1.27,-1.5 1.27,1.5, height 1.1
SOT-223 [mm]
  rect 2.4x1 smd: 1(2.9,-2.3) 2(2.9,0) 3(2.9,2.3)
  rect 2.4x3.3 smd: 4(-2.9,0)
  silkscreen extent -1.4,-3.47 3.03,3.35, body extent -3.49,-3.24 3.49,3.24, height 1.64
TO552P1530X450X2110-3B [mm]
  rect 4x4 hole 1.5: 1(-5.525,0) 2(0,0)
  rect 2.5x2.5 hole 1.5: 3(5.525,0)
  silkscreen extent -8.35,-0.1 -8.15,0.1, body extent -7.65,-1.4 7.65,3.1, height 21.1
TO-252 [mm] "D-PAK/TO-252-AA; 3 Leads (1 Cropped); Body 10.1 (inc. leads) x 6.6 mm (LxW max)"
  rect 1x2.1 smd: 1(-2.285,-3.375) 3(2.285,-3.375)
  rect 5.4x6.2 smd: 4(0,3.375)
  silkscreen extent -3.08,-4.32 3.09,6.38, body extent -3.27,-4.11 3.27,5.83, height 2.39
XCVR_HC-05 [mm]
  rect 1.3x1 smd: 1(-6.35,6.325) 2(-6.35,4.825) 3(-6.35,3.325) 4(-6.35,1.825) 5(-6.35,0.325) 6(-6.35,-1.175) 7(-6.35,-2.675) 8(-6.35,-4.175) 9(-6.35,-5.675) 10(-6.35,-7.175) 11(-6.35,-8.675) 12(-6.35,-10.175) 13(-6.35,-11.675) 22(6.35,-11.675) 23(6.35,-10.175) 24(6.35,-8.675) 25(6.35,-7.175) 26(6.35,-5.675) 27(6.35,-4.175) 28(6.35,-2.675) 29(6.35,-1.175) 30(6.35,0.325) 31(6.35,1.825) 32(6.35,3.325) 33(6.35,4.825) 34(6.35,6.325)
  rect 1x1.3 smd: 14(-5.25,-13.175) 15(-3.75,-13.175) 16(-2.25,-13.175) 17(-0.75,-13.175) 18(0.75,-13.175) 19(2.25,-13.175) 20(3.75,-13.175) 21(5.25,-13.175)
  silkscreen extent -8.1,6.4 -7.9,6.6, body extent -6.5,-13.45 6.5,13.45, height 2.2
ZMC [mil]
  oval 70x90 hole 39.37: 1(-245,0) 2(255,0)
  silkscreen extent -335,-200 340,195, body extent -334,-199 335,199, height 53

## Part data
C1 C3 C4 C5 C6 C7 C8 C9 C10 C13 C18 C20 C55 Cr: library part "CAP SMD 1206", "CAP 1206", Data=16-12-2016, Desc.="CAP SMD 1206", Designer="Abbas Basereh"
C11: "Capacitor", LatestRevisionDate=17-Jul-2002, LatestRevisionNote="Re-released for DXP Platform.", PackageDescription="Radial Cap, Thru-Hole; 2 Leads; 0.3 in Pin Spacing", PackageReference=RAD-0.3, Published=8-Jun-2000, Publisher="Altium Limited"
C12 C14 C17 C19: library part "Cap ELECTROLITIC TOTAL SIZE", "Cap electrolitic radial", Data=16-12-2016, Designer="Abbas Basereh"
C?: library part Cap-Bipolar, "Bipolar Capacitor", Voltage=100V, Adding Date=1387/12/20, Designer="Saeid Jorablo", Organazation=ControTec
D1 D2 D3 D4 D5 D6: "DIODE GEN PURP 75V 200MA DO213AA", ComponentLink1Description="Manufacturer Link", ComponentLink1URL=http://www.digikey.com/product-detail/en/microsemi-corporation/1N4148UR-1/1N4148UR-1-ND/4377991, ComponentLink2Description=Datasheet, PackageDescription="DIODE GEN PURP 75V 200MA DO213AA", PackageReference=DO-213AA&SOD-80, PackageVersion=2017-1-12, PART.NO=1N4148UR-1, Published=2017-1-12, Publisher="Abbas Basereh"
D7 D8 D9 D10 D13 D14 D15 D16: library part "1n4007 SMD M7", "Standard Rectifiers", Manufacturer="DC COMPONENTS", Data=16-12-2016, Designer="Abbas Basereh", Link=http://www.tme.eu/en/details/m7/smd-universal-diodes/dc-components/, Part. No=M7
D12: library part "LED SMD 1206"
IC1: "Integrated Circuit", Manufacturer_Name=STMicroelectronics, Mouser Part Number=511-STM32F030K6T6TR, Arrow Part Number=STM32F030K6T6TR, Arrow Price/Stock=https://www.arrow.com/en/products/stm32f030k6t6tr/stmicroelectronics, Datasheet Link=http://www.st.com/content/ccc/resource/technical/document/datasheet/a4/5d/0b/0e/87/c4/4d/71/DM00088500.pdf/files/DM00088500.pdf/jcr:content/translations/en.DM00088500.pdf, Height=1.6mm, Manufacturer_Part_Number=STM32F030K6T6TR, Mouser Price/Stock=https://www.mouser.co.uk/ProductDetail/STMicroelectronics/STM32F030K6T6TR/?qs=9MuLHSklicort60U4QZudQ%3D%3D
IC?: "Precision 500mA Regulator"
in1: library part "Header 2", "Header, 2-Pin", LatestRevisionDate=17-Jul-2002, LatestRevisionNote="Re-released for DXP Platform.", Publisher="Altium Limited"
L1: library part Inductor, "Inductor", Code_IEC=1005, Code_JEITA=0402, LatestRevisionDate=29-May-2009, LatestRevisionNote="IPC-7351 Footprint Added.", PackageDescription="Chip Inductor", PackageReference=0402-A, Published=8-Jun-2000, Publisher="Altium Limited"
Load1: "Header, 2-Pin", LatestRevisionDate=17-Jul-2002, LatestRevisionNote="Re-released for DXP Platform.", Publisher="Altium Limited"
MOC1: "Opto-Triac", Designer="Seyed Mohsen Ghasemian", E-mail=picpars@gmail.com, LatestRevisionDate=17-11-2011, Published=17-11-2011, Publisher=www.picpars.com, WEB=www.picpars.com
"NOKIA 1": library part "NOKIA 1202"
P1: "Header, 3-Pin", LatestRevisionDate=17-Jul-2002, LatestRevisionNote="Re-released for DXP Platform.", Publisher="Altium Limited"
P2: "Header, 5-Pin", LatestRevisionDate=17-Jul-2002, LatestRevisionNote="Re-released for DXP Platform.", Publisher="Altium Limited"
pc1: library part PC817XI, "DIP 4pin General Purpose  Photocoupler", ComponentLink1Description="Manufacturer Link", ComponentLink1URL=http://www.roboeq.ir/files/id/233/name/PC817.pdf/, ComponentLink2Description="DIP 4pin General Purpose", DatasheetVersion=2017-2-27, PackageDescription="SOP, 4-Leads, Body 4/65x6/75mm, Pitch 2/54mm, IPC Medium Density designer:abbas basereh", PackageReference="SMT Gullwing Lead-Form", PackageVersion=2017-2-27, Published=2017-2-27, Publisher="Abbas Basereh"
Q1: "45 V, 500 mA NPN general-purpose transistors", ComponentLink1Description="Manufacturer Link", ComponentLink1URL=http://www.nxp.com/, ComponentLink2Description=Datasheet, ComponentLink2URL=http://www.nxp.com/, DatasheetVersion=2017, LatestRevisionDate=2017, LatestRevisionNote="IPC-7351 Footprint Added.", PackageDescription="3-Pin SOT-23 Package 0.95 mm Pitch, 2.3 mm Lead Span", PackageReference=SOT23, PackageVersion=2017-2-8, Published=2017-2-8, Publisher="Abbas Basereh"
R2 R3 R3 R4 R5 R7 R8 R9 R10 R11 R14 R15 R17 R18 R25 R27 R30 RB1 rbut1 rledbut1 Rrx1 RT4 RT5 RTx1: library part "RES 1206 0.25W", "RES 1206", Data=16-12-2016, Desc.="RES SMD 1206", Designer="Abbas Basereh"
R6: "Semiconductor Resistor", LatestRevisionDate=17-Jul-2002, LatestRevisionNote="Re-released for DXP Platform.", PackageReference=AXIAL-0.5, Published=8-Jun-2000, Publisher="Altium Limited"
R21 R24: library part "RES DIP PACKAGE", "TOTAL DIP RESISTOR PACK", Designer="Ali Hafizi"
R22 R23: library part LR0204F13K3, "13.3 kOhms ±1% 0.25W, 1/4W Through Hole Resistor Axial - Metal Film", Package="Axial TE Connectivity Passive Product", Check_prices=https://www.snapeda.com/parts/LR0204F13K3/TE/view-part/?ref=eda, MF="TE Connectivity Passive Product", MP=LR0204F13K3, SnapEDA_Link=https://www.snapeda.com/parts/LR0204F13K3/TE/view-part/?ref=snap
ST1 ST2 ST3 ST4: "Switch", LatestRevisionDate=17-Jul-2002, LatestRevisionNote="Re-released for DXP Platform.", PackageDescription="Switch; 2 Leads", PackageReference=SPST-2, Published=24-Mar-1999, Publisher="Altium Limited"
tri1: library part BTA41-600A, "Thyristors, Discretes (diodes, transistors, thyristors ...), Semiconductors and Actives, original, triac, thyristors", Package="TOP-3 STMicroelectronics", Check_prices=https://www.snapeda.com/parts/BTA41-600A/STMicroelectronics/view-part/?ref=eda, MF=STMicroelectronics, MP=BTA41-600A, SnapEDA_Link=https://www.snapeda.com/parts/BTA41-600A/STMicroelectronics/view-part/?ref=snap
U1: library part AT24C512, "EEPROM"
U3: "Bluetooth to Serial Port Module", Package="Module ITead Studio", Check_prices=https://www.snapeda.com/parts/HC-05/ITEAD/view-part/?ref=eda, MF="ITead Studio", MP=HC-05, SnapEDA_Link=https://www.snapeda.com/parts/HC-05/ITEAD/view-part/?ref=snap
VR1: library part AMS1117
VR3: library part "VARISTOR (VDR)", "VARISTORS", Manufacturer=china-canada-philipina, Data=2017-1-5, Designer="Abbas Basereh", Link=digikey.com, Models=MOV-VDR-COV, Publisher="ABBAS BASEREH"
Zener1: "Zener Diode", Voltage="3.3 V", Company=E.P.I.L, Design Date=2011/11/02, Designer="Saeid Jorablo"
Buzzer1: ComponentLinkURL=www.picpars.com, Designer="Seyed Mohsen Ghasemain"

## Free pads (board coordinates)
  oval 4x5.5 hole 3: ""(-2.984,-50.265) ""(40.016,-50.265)
  round 5 hole 3 slot 5 at 0 deg: ""(-2.984,-20.265) ""(-2.984,39.735) ""(40.016,-20.265) ""(40.016,39.735)

## Via types
v1: diameter 1, hole 0.5, Top Layer to Bottom Layer, tented both sides, 91 vias
v2: diameter 1, hole 0.5, Top Layer to Bottom Layer, 6 vias
v3: diameter 0.8, hole 0.5, Top Layer to Bottom Layer, tented both sides, 2 vias

## Nets (pads, with @x,y where several pads share a name; then routed paths per layer and width w, separated by ;. In a path a pad name is that pad's centre, name@x,y a point inside that pad or via, vN(x,y) a via of type N, cw(c..) or ccw(c..) an arc to the next point about the centre after c; other vN are vias at no path point)
9v: C17.1 C20.2 IC?.1 R21.2 Zener1.2 | length 29.6
  Top Layer w1: Zener1.2 36.068,-16.408 41.148,-16.408 43.332,-14.224 43.332,-11.608 42.129,-10.405 C17.1
  Bottom Layer w1: R21.2 Zener1.2 ; IC?.1 40.553,-9.678 C17.1 ; C17.1@40.345,-9.709 C20.2@43.739,-9.709
adc3.4: IC1.10
amper: C9.2 D2.1 IC1.7 R15.2 | length 42.1
  Top Layer w0.5: v1(5.385,31.013) 5.385,12.446 8.509,9.322 v1(8.509,7.716)
  Bottom Layer w0.3: v1(5.385,31.013) v1@5.486,31.115
  Bottom Layer w0.4: v1@5.486,31.115 10.236,31.115 11.383,29.968 11.383,27.2 11.868,26.714 IC1.7 ; D2.1@8.129,9.957 8.129,8.096 v1(8.509,7.716)
  Bottom Layer w0.6: v1(8.509,7.716) 11.481,7.716 R15.2@11.582,7.614
backlight: IC1.15 R18.2 | length 4.3
  Bottom Layer w0.4: IC1.15 20.161,31.546 R18.2
buzzer: R6.2
GND: "NOKIA 1.1" "NOKIA 1.4" "NOKIA 1.9" "NOKIA 1.10" "NOKIA 1.12" C1.1 C3.1 C4.1 C5.2 C6.1 C7.1 C8.1 C9.1 C10.1 C12.2 C13.1 C14.2 C17.2 C18.1 C19.2 C20.1 C55.1 Cr.1 D4.1 D6.1 D9.1 D10.1 D12.1 IC1.16 IC1.31 IC1.32 IC?.4 MOC1.2 P1.3 P2.1 pad.@40.016,39.735 pad.@40.016,-20.265 pad.@-2.984,39.735 pad.@-2.984,-20.265 pc1.3 Q1.2 R5.2 R17.2 rbut1.2 ST1.1 ST2.1 ST3.1 ST4.1 U1.1 U1.2 U1.3 U1.4 U1.7 U3.13 U3.21 U3.22 VR1.1 Zener1.1 | length 296.2
  Top Layer w0.3: 9.22,31.217 9.22,30.709 9.665,30.264 11.1,30.264 11.466,30.63 11.466,34.325 ; 9.284,37.452 9.693,37.043 9.693,34.325 ; 21.158,-4.826 ST4.1@22.504,-4.826
  Top Layer w0.5: v1(6.147,37.592) 9.144,37.592 9.284,37.452 ; ST3.1@37.261,-4.826 ST3.1@37.643,-5.208 ; 37.643,-12.827 38.548,-13.732 C17.2
  Top Layer w0.6: ST2.1@21.256,-17.264 ST2.1@21.256,-9.517
  Top Layer w1: ST1.1@0.037,-4.826 14.757,-4.826 21.158,-4.826 ; ST2.1@21.256,-9.517 21.256,-4.924 ; ST4.1@22.504,-4.826 37.261,-4.826 39.766,-2.321 C19.2 41.85,-2.321 42.774,-1.397 42.774,3.531 41.859,4.445 C12.2 ; 37.643,-12.827 ST3.1@37.643,-5.208
  Bottom Layer w0.3: v1(4.928,9.703) 6.039,8.591 C8.1@6.039,8.534 ; v1(8.331,14.351) 8.732,13.95 C6.1@9.779,13.95 ; Cr.1@9.296,20.3 Cr.1@9.472,20.476 ; Cr.1 11.004,20.3 v2(11.024,20.32) ; v2(15.723,19.431) 15.723,19.558 15.773,19.609 15.773,20.476 ; U1.4 U1.3 U1.2 U1.1 ; U3.22 28.245,10.328 U3.21 ; v1@28.423,9.576 v1(28.423,9.906) ; C17.2 C17.2@40.016,-13.972 ; C20.1@43.684,-13.732 C20.1 ; C18.1 C18.1@44.221,-1.657
  Bottom Layer w0.4: C4.1@2.083,14.636 C3.1@6.68,14.636 ; IC1.16 22.862,28.952 24.155,30.245 D12.1@24.155,31.753 ; pad.@38.335,-21.946 pad.@40.016,-20.265
  Bottom Layer w0.5: C5.2 -4.75,24.734 -4.75,17.374 -3.378,16.002 P1.3 -0.565,14.484 C4.1@2.083,14.484 ; Q1.2 -4.648,-30.057 -4.648,-21.929 -2.984,-20.265 -2.984,-17.868 7.417,-7.468 v1(7.417,-5.461) ; pad.@-2.984,39.735 -0.841,37.592 v1(6.147,37.592) ; D6.1@0.33,1.701 0.33,0.559 0.864,0.025 4.877,0.025 5.334,0.483 D4.1@5.334,1.727 ; C1.1 19.126,5.5 U1.4 ; U1.2 21.666,7.366 21.692,7.341 v2(21.692,7.315) ; rbut1.2 31.984,37.815 v2(32.258,37.541) ; C17.2 C20.1@43.684,-13.732
  Bottom Layer w0.6: Q1.2 -5.258,-31.088 -5.258,-35.56 -4.445,-36.373 -3.101,-36.373 pc1.3 1.321,-36.246 2.87,-37.795 2.87,-41.681 1.753,-42.799 MOC1.2 ; D4.1@5.334,1.727 D4.1@5.613,2.007 ; D4.1@5.791,1.874 5.791,5.918 6.065,6.192 6.039,6.217 C8.1@6.039,8.534 ; C10.1 6.028,3.816 C9.1@8.509,3.816 ; U1.2 U1.7 ; 40.016,-35.469 40.03,-35.484
  Bottom Layer w0.7: C7.1@40.824,7.036 42.291,8.503 42.291,10.084 41.647,10.728 U3.13
  Bottom Layer w0.8: C18.1@44.221,-1.657 C13.1
  Bottom Layer w1: C14.2 25.527,-15.599 IC?.4 ; P2.1 31.394,40.538 31.984,39.948 rbut1.2 ; D9.1 31.725,-36.677 32.918,-35.484 40.03,-35.484 41.91,-35.484 43.104,-36.678 D10.1@43.104,-39.435 ; Zener1.1 pad.@38.335,-21.946 ; VR1.1 43.657,-2.221 C18.1 ; 40.016,-35.469 40.016,-20.265 C17.2@40.016,-13.972 ; C12.2 40.595,4.781 C7.1
  other v1: 23.012,-33.452 36.805,-29.134 25.806,-29.083 3.658,-17.145 -2.337,-13.462 8.306,-11.836 1.6,-8.357 25.044,-2.311 -2.515,-0.813 11.43,-0.203 -3.898,2.413 24.079,2.896 7.391,3.277 14.732,3.683 18.11,4.801 36.017,6.477 43.205,14.199 36.5,15.367 43.129,16.485 23.8,17.221 43.155,18.669 0.178,21.082 19.304,22.758 18.212,22.784 20.396,22.784 18.872,23.876 20.091,23.876 15.9,23.929 16.637,26.777 -2.134,28.372 22.047,30.455 -2.159,31.14 39.446,31.369 -2.184,34.168 34.493,34.823 8.712,40.894 5.639,41.25
  other v2: 21.666,13.669 13.386,16.231
  other v3: 16.764,32.969 14.757,33.579
INPUT: C3.2 D1.1 IC1.6 R2.1 R5.1 | length 18.1
  Bottom Layer w0.4: R5.1@4.42,18.358 R5.1@4.521,18.46 ; D1.1 7.062,23.242 7.595,23.774 7.595,25.222 8.287,25.914 IC1.6 ; R2.1 6.116,20.554 R2.1@6.68,19.99
  Bottom Layer w0.5: R5.1@4.623,18.358 6.985,18.358 C3.2@7.087,18.46 ; D1.1 5.613,21.33 R2.1 ; C3.2@6.68,18.536 R2.1@6.68,19.99
L: D13.1 D16.2 in1.2 Load1.1 R22.1 | length 69.5
  Top Layer w0.2: 30.861,-50.698 34.036,-50.698
  Top Layer w0.5: in1.2 in1.2@23.724,-57.836
  Top Layer w0.6: v1(18.136,-27.178) 16.535,-28.778 16.535,-34.442 18.618,-36.525 29.21,-36.525 34.036,-41.351 34.036,-50.698 ; in1.2@23.724,-57.836 30.861,-50.698 ; 34.036,-50.724 35.56,-52.248 R22.1
  Bottom Layer w0.6: D16.2 18.085,-27.229 v1(18.136,-27.178)
  Bottom Layer w1: D13.1 16.408,-30.124 D16.2
  Bottom Layer w4: Load1.1@14.859,-59.588 in1.2
  Bottom Layer w5: Load1.1 Load1.1@14.859,-59.588
LCD-DN: "NOKIA 1.5" IC1.13 | length 23.7
  Top Layer w0.3: v1(11.557,41.681) 11.379,41.859 11.379,41.631 12.057,40.953 12.057,34.325
  Bottom Layer w0.4: v1(11.557,41.681) 18.561,34.677 IC1.13
LCD-RST: "NOKIA 1.2" IC1.11 | length 19.8
  Top Layer w0.3: v1(9.525,39.268) 10.008,39.268 10.284,38.992 10.284,34.325
  Bottom Layer w0.3: v1(9.525,39.268) 13.437,35.357 13.437,33.223 14.402,32.258 15.885,32.258 16.961,31.182 IC1.11
LCD-SCE: "NOKIA 1.3" IC1.12 | length 21.7
  Top Layer w0.3: v1(10.389,40.869) 10.875,40.382 10.875,34.325
  Bottom Layer w0.3: v1(10.389,40.869) 17.761,33.496
  Bottom Layer w0.4: IC1.12 17.761,33.496
LCD-SCLK: "NOKIA 1.6" IC1.14 | length 23
  Top Layer w0.3: 12.648,34.325 12.648,41.019 13.36,41.732 13.487,41.605 v1(13.487,41.529)
  Bottom Layer w0.4: v1(13.487,41.529) 19.361,35.655 IC1.14
n: C?.2 D14.2 D15.1 in1.1 R23.1 tri1.2 VR3.2 | length 40.3
  Bottom Layer w0.5: tri1.2 tri1.2@21.615,-48.26
  Bottom Layer w0.6: D15.1 18.872,-37.262 20.65,-39.04 C?.2
  Bottom Layer w1: D15.1 16.412,-37.211 D14.2
  Bottom Layer w2: C?.2 21.615,-41.478 tri1.2@21.615,-48.26 ; 22.581,-44.374 VR3.2
  Bottom Layer w4: tri1.2 21.285,-50.775 23.978,-53.467 30.15,-53.467 31.877,-55.194 in1.1
NetBuzzer1_1: Buzzer1.1 RB1.2 | length 5.6
  Bottom Layer w1: Buzzer1.1@16.121,-19.669 18.194,-21.742 RB1.2@20.853,-21.742
NetBuzzer1_2: Buzzer1.2 Q1.3 | length 16.5
  Bottom Layer w0.7: Q1.3 -3.277,-25.73 -1.295,-23.749 4.391,-23.749 Buzzer1.2@8.471,-19.669
NetC5_1: C5.1 P1.1 R3.1@2.464,23.399 | length 8.4
  Bottom Layer w0.5: P1.1 P1.1@-1.473,21.082 ; -0.406,23.216 2.28,23.216 R3.1@2.464,23.399 ; C5.1@-0.406,24.663 -0.406,25.177 C5.1
  Bottom Layer w0.7: P1.1 -2.083,21.59 -0.406,23.266 C5.1@-0.406,24.663
NetC8_2: C8.2 R14.2 R15.1 | length 41.4
  Bottom Layer w0.4: 2.134,12.09 2.159,12.116
  Bottom Layer w0.5: R15.1@10.973,3.689 12.299,3.689 13.761,5.15 13.761,10.775 12.421,12.116
  Bottom Layer w0.6: R14.2@-0.279,3.765 -3.079,3.765 -3.886,4.572 -3.886,10.541 -2.311,12.116 2.159,12.116 12.421,12.116 ; 2.134,12.09 2.134,11.455 2.139,11.45 C8.2@2.139,8.534
NetC10_2: C10.2 D3.2 D5.2 R14.1 R17.1 | length 14.9
  Top Layer w0.5: v1(3.226,3.816) 4.744,3.816 6.756,1.803 v1(8.865,1.803)
  Bottom Layer w0.4: C10.2 3.212,3.83 v1(3.226,3.816)
  Bottom Layer w0.6: R14.1@-0.559,7.436 -0.07,7.436 0.692,6.674 2.165,6.674 2.165,6.192 2.165,3.88 C10.2 ; C10.2@2.388,2.966 2.388,2.133 D5.2@2.819,1.701
NetC11_1: C11.1 R22.2 | length 26.2
  Top Layer w0.6: C11.1 25.654,-30.632 35.56,-40.538 R22.2
NetC11_2: C11.2 D7.1 D10.2 | length 18.9
  Bottom Layer w0.6: D7.1@39.472,-44.094 D10.2@42.774,-44.094 ; D10.2 44.145,-44.044 44.933,-43.256 44.933,-32.309 C11.2
NetC14_1: C14.1 D7.2 D8.2 R21.1 | length 30.9
  Top Layer w0.4: C14.1 C14.1@26.06,-21.209
  Top Layer w1: R21.1 30.734,-27.254 35.712,-32.233 v1@35.712,-37.821
  Bottom Layer w0.4: C14.1 C14.1@25.806,-21.463 ; R21.1@30.48,-21.463 R21.1
  Bottom Layer w0.6: v1(35.636,-37.821) 35.686,-37.871 D8.2@35.686,-39.617 ; D7.2@39.217,-39.617 D7.2@39.471,-39.363
  Bottom Layer w1: C14.1@25.806,-21.463 R21.1@30.48,-21.463 ; D8.2@35.686,-39.617 D7.2@39.217,-39.617
NetC?_1: C?.1 RT4.2 RT5.2 | length 6.3
  Bottom Layer w1: RT4.2 RT5.2 15.492,-40.671 C?.1
NetD3_1: D3.1 D4.2 L1.2 | length 10.1
  Bottom Layer w0.5: D4.2@5.334,-1.573 8.202,-1.573 10.465,-3.835 L1.2
NetD5_1: D5.1 D6.2 L1.1 | length 10.2
  Bottom Layer w0.4: D6.2@-0.355,-1.599 D6.2@0.33,-1.599
  Bottom Layer w0.5: L1.1 -2.235,-3.48 D6.2@-0.355,-1.599 ; D6.2@0.33,-1.599 D5.1@2.819,-1.599
NetD8_1: D8.1 D9.2 R24.2 | length 9.8
  Bottom Layer w0.6: R24.2 28.6,-41.605 31.14,-44.145 D9.2 35.705,-44.145 D8.1@35.737,-44.113
NetD12_2: D12.2 rledbut1.2 | length 3
  Bottom Layer w0.3: D12.2@24.054,34.745 D12.2@24.359,35.049
  Bottom Layer w0.5: D12.2@24.155,35.253 26.692,35.253 rledbut1.2@26.721,35.224
NetD13_2: D13.2 D15.2 pc1.2 | length 15.8
  Top Layer w1: v1(9.017,-36.297) 9.017,-30.683 v1(9.474,-30.226)
  Bottom Layer w0.4: v1(9.474,-30.226) 11.328,-30.226 D13.2
  Bottom Layer w0.6: pc1.2 6.276,-36.297 v1(9.017,-36.297) 9.398,-36.678 10.9,-36.678 D15.2
  Bottom Layer w0.7: v1(9.474,-30.226) 9.525,-30.277 D13.2
NetD14_1: D14.1 D16.1 R27.1 | length 12.2
  Bottom Layer w0.6: D14.1 9.042,-33.553 7.518,-32.029 7.518,-29.032 9.296,-27.254 D16.1
NetLoad1_2: Load1.2 RT5.1 tri1.1 VR3.1 | length 26.6
  Bottom Layer w1: 10.603,-48.675 11.659,-47.619 RT5.1
  Bottom Layer w2: tri1.1 15.76,-46.063 VR3.1
  Bottom Layer w4: Load1.2 6.172,-53.106 10.688,-48.59 ; 10.603,-48.675 tri1.1@14.91,-48.438
NetMOC1_1: MOC1.1 R30.1 | length 2.6
  Bottom Layer w1: R30.1@-3.703,-45.339 MOC1.1
NetMOC1_4: MOC1.4 tri1.3 | length 42.2
  Top Layer w1: MOC1.4 6.299,-40.462 3.886,-40.462 2.032,-42.316 2.032,-48.715 7.063,-53.746 24.18,-53.746 26.81,-51.116 tri1.3
NetMOC1_6: MOC1.6 RT4.1 | length 3.2
  Bottom Layer w1: MOC1.6 8.63,-45.339 RT4.1
"NetNOKIA 1_11": "NOKIA 1.11" R18.1 | length 14.8
  Top Layer w0.4: 15.602,34.325 15.602,40.672 v1(16.231,41.3)
  Bottom Layer w0.3: v1(16.231,41.3) 15.869,41.3 16.088,41.519 16.269,41.338 20.828,36.779 R18.1@20.828,36.545
Netpc1_1: pc1.1 R27.2 | length 6.3
  Bottom Layer w0.5: pc1.1@5.664,-33.706 pc1.1
  Bottom Layer w0.6: R27.2 2.997,-30.308 2.997,-32.664 4.039,-33.706 pc1.1@5.664,-33.706
NetQ1_1: Q1.1 R6.1 | length 1.8
  Bottom Layer w0.3: R6.1@-0.762,-30.057 -0.326,-30.057 R6.1
  Bottom Layer w0.7: Q1.1@-2.057,-30.057 R6.1@-0.762,-30.057
NetR23_2: R23.2 R24.1 | length 9.7
  Bottom Layer w0.7: R24.1 24.79,-40.234 28.423,-43.866 28.423,-44.602 30.684,-46.863 R23.2
Netrbut1_1: rbut1.1 U3.34 | length 16.7
  Bottom Layer w0.3: rbut1.1@35.884,37.897 rbut1.1@36.297,37.897
  Bottom Layer w0.5: U3.34 34.722,28.728 36.297,30.302 rbut1.1@36.297,37.897
Netrledbut1_1: rledbut1.1 U3.31 | length 16.1
  Top Layer w0.5: v1(27.762,31.217) 30.81,31.217 33.503,28.524 33.503,25.248 32.588,24.333 v1(29.362,24.333)
  Bottom Layer w0.3: rledbut1.1@26.543,31.146 rledbut1.1@26.721,31.324 ; U3.31 29.257,24.228 v1(29.362,24.333)
NetRrx1_2: Rrx1.2 U3.1 | length 4.5
  Bottom Layer w0.5: U3.1 42.469,28.728 43.358,29.616 Rrx1.2
NetRTx1_2: RTx1.2 U3.2 | length 3.1
  Bottom Layer w0.3: U3.2 U3.2@41.026,27.147
  Bottom Layer w0.7: U3.2@41.026,27.147 RTx1.2
RESET: Cr.2 IC1.4 P2.5 R11.2 | length 47
  Top Layer w0.4: v1(7.188,34.798) 3.353,34.798 2.896,34.341 2.896,32.741 3.505,32.131 6.045,32.131 6.706,31.471 6.706,28.804 7.995,27.514 v1(9.423,27.514) 9.423,24.435 v1(8.814,23.825)
  Bottom Layer w0.3: Cr.2@9.296,24.2 Cr.2@9.41,24.314 ; R11.2 9.418,27.52 v1(9.423,27.514)
  Bottom Layer w0.4: Cr.2@9.41,24.314 IC1.4
  Bottom Layer w0.5: v1(7.188,34.798) 7.391,35.001 7.391,41.224 8.949,42.781 17.899,42.781 P2.5
rx: IC1.9 Rrx1.1 | length 31.9
  Top Layer w0.3: v1(14.681,29.845) v1@14.961,29.566
  Top Layer w0.5: v1@14.961,29.566 18.542,29.566 25.044,36.068 41.3,36.068 v1(42.215,35.154)
  Bottom Layer w0.3: v1(14.681,29.845) 14.681,29.632 IC1.9
SCL: IC1.18 R3.1@25.375,12.212 U1.6 | length 26.2
  Bottom Layer w0.4: U1.6 20.396,14.122 21.082,14.808 25.883,14.808 ; IC1.18 25.305,26.714 26.619,25.4 26.619,13.456 R3.1@25.375,12.212
  Bottom Layer w0.6: 25.883,14.808 26.416,14.808
SDA: IC1.19 R4.1 U1.5 | length 23.3
  Bottom Layer w0.3: R4.1 R4.1@17.647,12.713
  Bottom Layer w0.4: U1.5 19.126,14.122 20.574,15.57 24.435,15.57 25.781,16.916 25.781,24.968 24.835,25.914 IC1.19
  Bottom Layer w0.5: R4.1@17.647,12.713 U1.5
Sens: C4.2 P1.2 R2.2 | length 6.6
  Bottom Layer w0.5: C4.2@2.216,18.517 R2.2
  Bottom Layer w0.7: P1.2 2.19,18.542 C4.2@2.216,18.517
sw1: IC1.28 R7.2 ST1.2 | length 40.6
  Top Layer w0.5: ST1.2@0.037,0 7.784,0 7.834,-0.051 v1(9.093,-0.051) 18.771,9.627 v1(18.771,15.951)
  Bottom Layer w0.3: IC1.28 18.561,16.237 18.771,16.027 v1(18.771,15.951)
  Bottom Layer w0.5: v1(9.093,-0.051) v1@9.373,-0.051 ; R7.2@13.761,-4.439 R7.2
  Bottom Layer w0.6: v1@9.373,-0.051 R7.2@13.761,-4.439
SW2: IC1.27 R8.2 ST2.2 | length 49
  Top Layer w0.5: v1(18.745,-2.794) 18.618,-2.667 13.64,-2.667 12.675,-1.702 12.675,1.118 13.868,2.311 17.551,2.311 20.086,4.846 v1(20.086,16.688)
  Top Layer w0.6: ST2.2@16.43,-17.264 ST2.2@16.43,-9.517
  Bottom Layer w0.3: IC1.27 19.361,17.412 v1(20.086,16.688)
  Bottom Layer w0.5: R8.2@17.272,-8.433 18.745,-6.96 v1(18.745,-2.794)
  Bottom Layer w1: v1(15.519,-8.839) R8.2@16.307,-8.839
sw3: IC1.25 R9.2 ST3.2 | length 33.3
  Top Layer w0.5: v1(22.504,18.872) 24.435,18.872 30.048,13.259 30.048,0.535 ST3.2@29.514,0
  Top Layer w0.7: ST3.2@29.514,0 ST3.2@37.261,0
  Bottom Layer w0.3: IC1.25 20.961,20.416 v1(22.504,18.872)
  other v1: 30.074,1.372
SW4: IC1.26 R10.2 ST4.2 | length 44.4
  Top Layer w0.3: ST4.2@14.757,0 22.504,0 22.098,0.406 v1(22.098,1.499)
  Top Layer w0.5: ST4.2@14.757,0 22.504,0 24.054,0 25.984,1.93 25.984,12.852 v1(21.209,17.628)
  Bottom Layer w0.3: IC1.26 20.161,18.676 v1(21.209,17.628)
  Bottom Layer w0.6: R10.2 21.488,2.108 v1(22.098,1.499)
TCK: IC1.24 P2.3 | length 38.4
  Top Layer w0.6: v1(23.673,21.158) 34.036,21.158 36.373,23.495 36.373,30.099 v1(34.468,32.004)
  Bottom Layer w0.3: IC1.24 23.374,21.914 23.673,21.615 v1(23.673,21.158)
  Bottom Layer w0.6: P2.3 25.222,39.649 26.568,38.303 28.651,38.303 34.468,32.487 v1(34.468,32.004)
TMS: IC1.23 P2.4 | length 35.4
  Top Layer w0.5: v1(23.978,22.809) 33.096,22.809 34.557,24.27 34.557,29.451 v1(33.071,30.937)
  Bottom Layer w0.3: IC1.23 23.883,22.714 v1(23.978,22.809)
  Bottom Layer w0.5: P2.4 22.682,40.183 25.73,37.135 28.143,37.135 33.071,32.207 v1(33.071,30.937)
triakPulse: IC1.30 R30.2 | length 84.1
  Top Layer w0.5: v1(-4.013,-40.005) -4.597,-39.421 -4.597,-29.337 0.483,-24.257 0.483,-18.593 -5.182,-12.929 -5.182,3.581 -1.219,7.544 4.318,7.544 5.613,6.248 9.898,6.248 15.672,12.022 15.672,15.9 v1(15.977,16.205)
  Bottom Layer w0.3: R30.2 -4.013,-41.103 R30.2@-4.013,-40.919 ; v1(15.977,16.205) 16.961,17.19 IC1.30
  Bottom Layer w0.4: R30.2@-4.013,-40.919 v1(-4.013,-40.005)
tx: IC1.8 RTx1.1 | length 45
  Top Layer w0.5: v1(12.903,28.346) 21.768,28.346 26.822,33.401 41.072,33.401 43.053,31.42 v1(43.053,22.301)
  Bottom Layer w0.3: v1(12.903,28.346) 12.903,28.143 13.532,27.514 IC1.8 ; v1(43.053,22.301) 43.073,22.301 RTx1.1
VCC-3.3v: "NOKIA 1.7" "NOKIA 1.8" C1.2 C6.2 C7.2 C12.1 C13.2 C55.2 D1.2 D2.2 IC1.1 IC1.5 IC1.17 R3.2@25.375,8.312 R4.2 R7.1 R8.1 R9.1 R10.1 R11.1 R25.2 U1.8 U3.12 VR1.2 VR1.4 | length 220.7
  Top Layer w0.3: v1@5.309,33.172 v1(5.563,33.426) ; 12.827,29.464 13.238,29.875 13.238,34.325 13.829,34.325
  Top Layer w0.5: v1(5.563,33.426) 6.883,33.426 7.671,32.639 7.671,30.988 9.195,29.464 11.125,29.464 ; 12.827,29.464 11.125,29.464 ; v1(17.697,25.165) 12.503,25.165 11.125,26.543 11.125,29.464
  Top Layer w0.6: v1(11.582,10.744) 11.582,11.633 v1(13.31,13.36)
  Top Layer w1: v1(24.841,28.143) 30.455,28.143 v1(32.41,26.187)
  Bottom Layer w0.3: C55.2@4.191,33.026 C55.2@5.156,33.026 ; D1.2@5.518,26.638 D1.2 ; R7.1 15.215,-0.539 ; R10.1 R10.1@16.49,2.718 ; v1@17.697,25.114 v1(17.697,25.165)
  Bottom Layer w0.4: IC1.1 15.564,21.914 17.697,24.047 17.697,25.114 IC1.5 ; v1(17.697,25.165) 20.047,27.514 IC1.17 24.212,27.514 v1(24.841,28.143)
  Bottom Layer w0.5: D1.2@5.518,26.638 R11.1 ; R25.2 R25.2@6.573,-26.645 ; C6.2@9.398,17.8 11.907,17.8 13.923,19.816 IC1.1
  Bottom Layer w0.6: U1.8 22.936,10.75 25.375,8.312 25.375,5.436 ; C1.2@23.089,5.207 27.33,5.207 ; R9.1 R9.1@35.275,2.464
  Bottom Layer w0.7: C55.2@4.191,33.026 4.064,32.899 4.064,29.667 4.978,28.753 R11.1
  Bottom Layer w1: R25.2@6.293,-26.924 6.573,-26.645 R25.2@6.731,-26.486 ; R25.2 6.573,-25.203 20.898,-10.877 R8.1 20.898,-7.296 23.673,-4.521 27.203,-4.521 ; v1(13.31,13.36) 15.062,11.608 15.062,9.119 15.945,8.235 R4.2 16.49,7.657 R10.1@16.49,2.718 ; 15.215,-0.539 16.332,-0.539 ; R10.1 16.49,-0.381 16.332,-0.539 ; C1.2 34.061,5.385 35.275,4.171 R9.1@35.275,2.464 ; 23.686,-4.61 19.615,-0.539 16.332,-0.539 ; 27.33,5.207 27.33,-4.394 27.203,-4.521 ; v1(32.41,26.187) 32.41,14.402 34.584,12.228 U3.12 43.093,12.228 44.221,11.1 C13.2 40.824,1.448 C12.1 35.884,1.448 R9.1 ; VR1.2 VR1.4 27.203,-4.521
VCC_5V: C18.2 C19.1 IC?.3 P2.2 R3.2@2.464,27.299 RB1.1 VR1.3 | length 172.6
  Top Layer w0.3: 27.813,43.053 42.85,43.053
  Top Layer w0.7: v1(1.067,27.229) 1.067,41.224 2.896,43.053 42.824,43.053 ; P2.2 27.762,43.053 ; C19.1 43.323,-5.775 44.628,-4.47 44.628,41.275 42.85,43.053
  Top Layer w1: v1(35.509,-7.366) 34.62,-8.255 34.62,-13.665 v1(35.814,-14.859)
  Bottom Layer w0.3: v1(1.067,27.229) 1.276,27.02 R3.2@2.362,27.02 ; C19.1 40.447,-6.014 C18.2
  Bottom Layer w0.4: IC?.3 IC?.3@36.372,-14.248
  Bottom Layer w0.5: v1(35.814,-14.859) 35.912,-14.761 IC?.3
  Bottom Layer w1: RB1.1@21.107,-17.374 21.107,-15.037 23.647,-12.497 23.647,-8.966 25.07,-7.544 35.331,-7.544 v1(35.509,-7.366) ; VR1.3@35.509,-6.821 39.162,-6.821 C19.1 43.525,-5.775 C18.2
ZeroCross: IC1.29 pc1.4 R25.1 | length 78.3
  Top Layer w0.5: v1(-2.997,-32.639) 0.254,-32.639 1.88,-31.013 1.88,-25.984 1.905,-25.959 v1(1.905,-25.679) 1.905,-15.291 -4.013,-9.373 -4.013,0.025 1.041,5.08 11.252,5.08 17.247,11.074 v1(17.247,15.164)
  Bottom Layer w0.3: v1@1.651,-25.756 2.048,-26.152 2.048,-26.477 R25.1 ; v1@1.727,-25.679 v1(1.905,-25.679) ; v1(17.247,15.164) 17.611,15.528 17.611,20.326 IC1.29
  Bottom Layer w0.5: v1@1.727,-25.679 2.673,-26.625 R25.1